# Altium PCB Kasli_BP_Adapter.PCBDOC (part 3 of 3)
Units mil, origin at the board's own origin, x right, y up, seen from the top; angles counter-clockwise.
Board outline 2027.63 x 3937 mil, 4 copper layers (TopLayer, MP(G), MidLayer1, BottomLayer), stack 64.961 mil thick; 18 components, 82 nets, 256 pads, 42 vias.
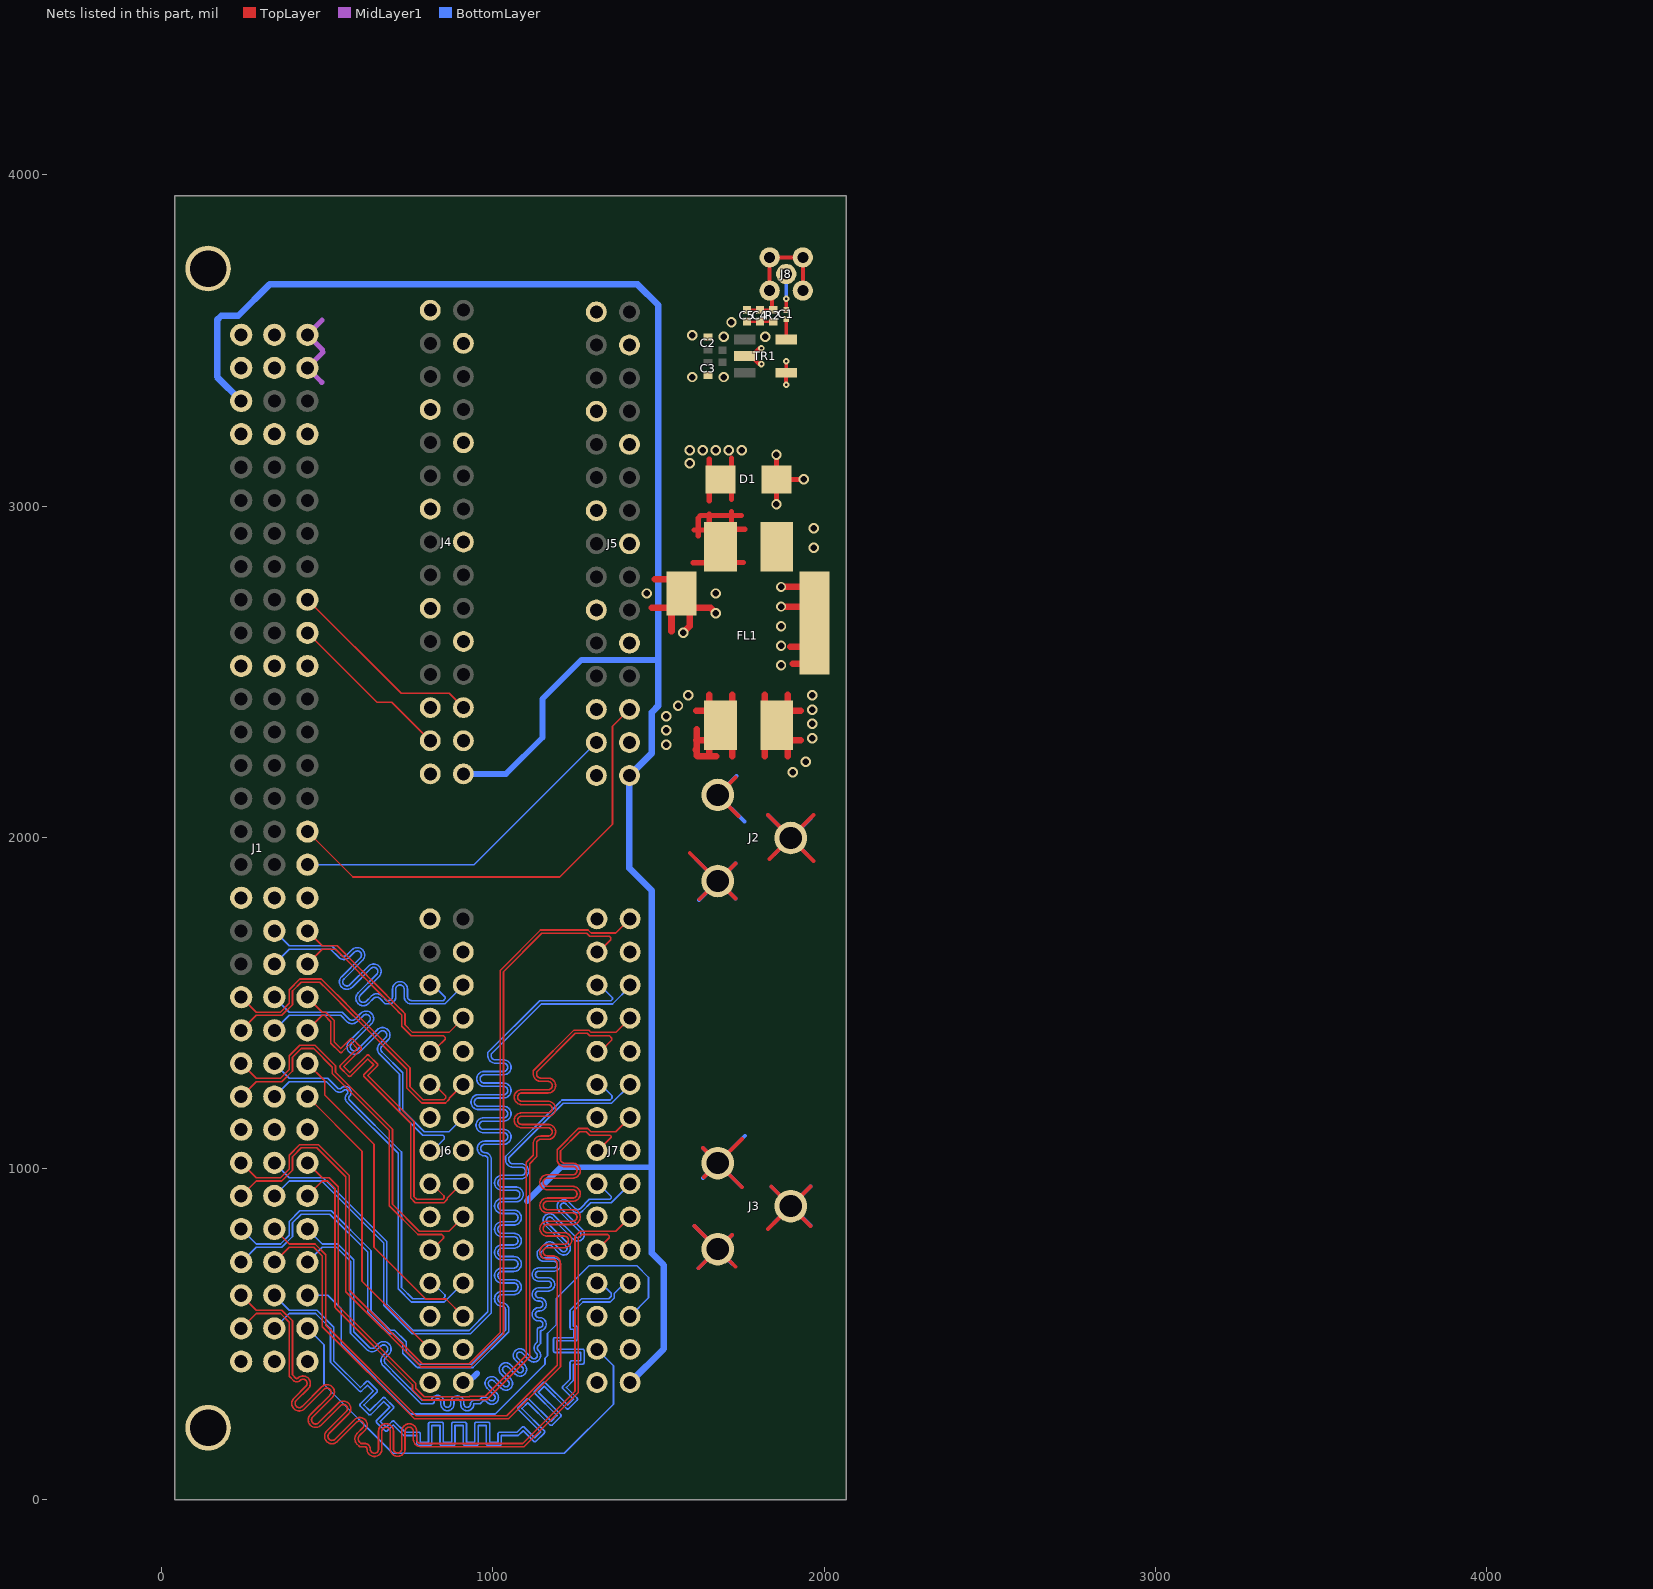
[diagram p4: the nets of this part, all layers, seen from the top]

## Via types
v1: diameter 31.5, hole 19.68, TopLayer to BottomLayer, tented both sides, 37 vias
v2: diameter 19.68, hole 7.87, TopLayer to BottomLayer, tented both sides, 5 vias

## Nets (pads, with @x,y where several pads share a name; then routed paths per layer and width w, separated by ;. In a path a pad name is that pad's centre, name@x,y a point inside that pad or via, vN(x,y) a via of type N, cw(c..) or ccw(c..) an arc to the next point about the centre after c; other vN are vias at no path point) (continued)
EXT10.LVDS_1_N: J1.b13 J6.6 | length 1148.4
  BottomLayer w5: J1.b13@340.16,1617.32 385.16,1662.32 509.68,1662.32 534.34,1637.66 ccw(c550.24,1653.58) 566.14,1637.66 581.91,1653.44 cw(c590.75,1644.6) 599.59,1653.44 cw(c590.75,1644.6) 603.25,1644.6 cw(c590.75,1644.6) 599.59,1635.76 543.31,1579.48 ccw(c559.22,1563.57) 543.31,1547.66 ccw(c559.22,1563.57) 575.12,1547.65 631.41,1603.94 cw(c640.25,1595.1) 649.09,1603.94 cw(c640.25,1595.1) 652.75,1595.1 cw(c640.25,1595.1) 649.09,1586.26 592.8,1529.97 ccw(c608.72,1514.07) 592.81,1498.16 ccw(c608.72,1514.07) 624.62,1498.15 640.39,1513.93 cw(c649.23,1505.09) 658.07,1513.93 675,1497 684.57,1497 ccw(c684.57,1519.5) 707.07,1519.5 707.07,1541.8 cw(c719.57,1541.8) 732.07,1541.8 732.07,1519.5 ccw(c754.57,1519.5) 754.57,1497 854.58,1497 J6.6@910.43,1552.86
EXT10.LVDS_1_P: J1.b14 J6.5 | length 1139.6
  BottomLayer w5: J1.b14@340.16,1717.32 385.16,1672.32 513.82,1672.32 541.4,1644.74 ccw(c550.24,1653.58) 559.08,1644.74 574.84,1660.51 cw(c590.75,1644.6) 606.66,1660.51 cw(c590.75,1644.6) 613.25,1644.6 cw(c590.75,1644.6) 606.66,1628.69 550.38,1572.41 ccw(c559.22,1563.57) 550.38,1554.73 ccw(c559.22,1563.57) 568.06,1554.73 624.35,1611.02 cw(c640.25,1595.1) 656.16,1611.01 cw(c640.25,1595.1) 662.75,1595.1 cw(c640.25,1595.1) 656.16,1579.19 599.88,1522.91 ccw(c608.72,1514.07) 599.88,1505.23 ccw(c608.72,1514.07) 617.56,1505.23 633.32,1521 ; 633.33,1521.01 cw(c649.23,1505.09) 665.13,1521.01 679.14,1507 684.57,1507 ccw(c684.57,1519.5) 697.07,1519.5 697.07,1541.8 cw(c719.57,1541.8) 742.07,1541.8 742.07,1519.5 ccw(c754.57,1519.5) 754.57,1507 850.43,1507 856.65,1513.22 856.65,1517.36 820.08,1553.94 J6.5@810.43,1553.94
EXT10.LVDS_2_N: J1.c13 J6.9 | length 603.2
  TopLayer w5: J1.c13@440.16,1617.32 485.16,1662.32 525.68,1662.32 575.11,1612.89 592.79,1595.21 599.86,1588.14 626.02,1561.98 636,1552 708.93,1479.07 716,1472 724.51,1463.49 724.51,1429.64 753.21,1400.94 851.03,1400.94 856.3,1395.67 856.3,1390.75 J6.9@832.78,1367.22
EXT10.LVDS_2_P: J1.c14 J6.8 | length 634.8
  TopLayer w5: J1.c14@440.16,1717.32 485.16,1672.32 529.82,1672.32 582.18,1619.96 599.86,1602.28 606.93,1595.21 635.12,1567.02 643.07,1559.07 716,1486.14 724.51,1477.63 734.51,1467.63 734.51,1433.78 757.35,1410.94 867.44,1410.94 J6.8@910.43,1453.94
EXT10.LVDS_3_N: J1.a11 J6.12 | length 963.4
  TopLayer w5: J1.a11@240.16,1417.32 285.16,1462.32 362.89,1462.32 395.19,1494.63 395.19,1535.95 421.53,1562.29 477.71,1562.29 501.07,1538.93 535.38,1504.62 542.45,1497.55 560.13,1479.87 600.78,1439.22 740,1300 740,1243 785,1198 856.83,1198 868.27,1209.44 868.27,1211.77 J6.12@910.43,1253.94
EXT10.LVDS_3_P: J1.a12 J6.11 | length 944
  TopLayer w5: J1.a12@240.16,1517.32 285.16,1472.32 358.75,1472.32 385.19,1498.77 385.19,1540.09 417.39,1572.29 481.86,1572.29 508.14,1546 549.52,1504.62 567.2,1486.94 574.27,1479.87 607.86,1446.28 750,1304.14 750,1247.14 789.14,1208 852.69,1208 858.27,1213.58 858.27,1218.5 J6.11@822.83,1253.94
EXT10.LVDS_4_N: J1.b11 J6.15 | length 1114.3
  BottomLayer w5: J1.b11@340.16,1417.32 385.16,1462.32 540.68,1462.32 559.09,1443.91 ccw(c574.99,1459.83) 590.89,1443.91 608.58,1461.6 cw(c617.41,1452.76) 626.25,1461.6 cw(c617.41,1452.76) 629.91,1452.76 cw(c617.41,1452.76) 626.25,1443.92 566.15,1383.82 ccw(c582.06,1367.91) 566.15,1352 ccw(c582.06,1367.91) 597.96,1351.99 658.07,1412.1 cw(c666.91,1403.26) 675.75,1412.1 cw(c666.91,1403.26) 679.41,1403.26 cw(c666.91,1403.26) 675.75,1394.42 658.06,1376.74 ccw(c673.98,1360.84) 658.07,1344.93 718,1285 718,1171.42 788.48,1100.94 848.97,1100.94 853.15,1096.76 853.15,1089.37 817.72,1053.94 J6.15@810.43,1053.94
EXT10.LVDS_4_P: J1.b12 J6.14 | length 1122.8
  BottomLayer w5: J1.b12@340.16,1517.32 385.16,1472.32 544.82,1472.32 566.15,1450.99 ccw(c574.99,1459.83) 583.83,1450.99 601.51,1468.67 ; 601.51,1468.68 cw(c617.41,1452.76) 633.32,1468.67 cw(c617.41,1452.76) 639.91,1452.76 cw(c617.41,1452.76) 633.32,1436.85 573.22,1376.75 ccw(c582.06,1367.91) 573.22,1359.07 ccw(c582.06,1367.91) 590.9,1359.07 651.01,1419.18 cw(c666.91,1403.26) 682.82,1419.17 cw(c666.91,1403.26) 689.41,1403.26 cw(c666.91,1403.26) 682.82,1387.35 665.14,1369.68 ccw(c673.98,1360.84) 665.14,1352 728,1289.14 728,1175.57 792.62,1110.94 867.44,1110.94 ; 867.44,1111.22 867.72,1111.22 J6.14@910.43,1153.94
EXT10.LVDS_5_N: J1.c11 J6.18 | length 1157.8
  TopLayer w5: J1.c11@440.16,1417.32 485.16,1462.32 491.54,1462.32 511,1442.86 511,1377.86 537.3,1351.55 ccw(c540.84,1355.09) 544.37,1351.55 ; 544.39,1351.57 573.16,1380.34 590.84,1362.66 539.5,1311.32 ccw(c543.03,1307.79) 539.5,1304.25 564.24,1279.5 ccw(c567.78,1283.04) 571.32,1279.5 ; 571.33,1279.52 622.66,1330.84 640.34,1313.17 611.56,1284.39 ccw(c615.09,1280.84) 611.55,1277.31 752,1136.86 752,910.86 765.92,896.93 852.51,896.93 862.36,906.79 862.36,910.93 905.37,953.94 J6.18@910.43,953.94
EXT10.LVDS_5_P: J1.c12 J6.17 | length 1138.6
  TopLayer w5: J1.c12@440.16,1517.32 485.16,1472.32 495.68,1472.32 521,1447 521,1382 540.84,1362.16 569.63,1390.95 cw(c573.16,1387.41) 576.7,1390.95 601.43,1366.21 cw(c597.91,1362.66) 602.91,1362.66 cw(c597.91,1362.66) 601.44,1359.13 550.1,1307.79 567.78,1290.11 619.12,1341.45 cw(c622.66,1337.91) 626.19,1341.45 650.94,1316.7 cw(c647.41,1313.17) 652.41,1313.17 cw(c647.41,1313.17) 650.94,1309.63 622.16,1280.84 762,1141 762,915 770.07,906.93 848.37,906.93 852.36,910.93 852.36,917.07 815.5,953.94 J6.17@810.43,953.94
EXT10.LVDS_6_N: J1.a9 J6.21 | length 1136.1
  TopLayer w5: J1.a9@240.16,1217.32 285.16,1262.32 362.89,1262.32 395.19,1294.63 395.19,1335.95 421.53,1362.29 458.78,1362.29 515,1306.07 515,1286.86 687,1114.86 687,887.8 773.86,800.94 845.94,800.94 851.15,795.73 851.15,789.14 815.95,753.94 J6.21@810.43,753.94
EXT10.LVDS_6_P: J1.a10 J6.20 | length 1149.1
  TopLayer w5: J1.a10@240.16,1317.32 285.16,1272.32 358.75,1272.32 385.19,1298.77 385.19,1340.09 417.39,1372.29 462.93,1372.29 525,1310.21 525,1291 697,1119 697,891.94 778,810.94 867.44,810.94 J6.20@910.43,853.94
EXT10.LVDS_7_N: J1.b9 J6.24 | length 1156.3
  BottomLayer w5: J1.b9@340.16,1217.32 385.16,1262.32 497.68,1262.32 524.43,1235.58 ccw(c536.8,1247.95) 549.17,1235.57 cw(c554.48,1230.27) 559.78,1235.57 cw(c554.48,1230.27) 561.98,1230.27 cw(c554.48,1230.27) 559.78,1224.97 ccw(c572.15,1212.59) 559.78,1200.22 714,1046 714,636.86 753.92,596.93 853.43,596.93 865.31,608.82 ; 865.43,608.82 865.43,608.94 J6.24@910.43,653.94
EXT10.LVDS_7_P: J1.b10 J6.23 | length 1135.9
  BottomLayer w5: J1.b10@340.16,1317.32 385.16,1272.32 501.82,1272.32 531.5,1242.64 ccw(c536.8,1247.95) 542.1,1242.65 cw(c554.48,1230.27) 571.98,1230.27 cw(c554.48,1230.27) 566.85,1217.9 ccw(c572.15,1212.59) 566.85,1207.29 724,1050.14 724,641 758.07,606.93 849.25,606.93 855.31,613 855.31,618.11 J6.23@819.49,653.94
EXT11.LVDS_0_N: J1.a6 J7.3 | length 2927.3
  TopLayer w5: J1.a6@240.16,917.32 285.16,962.32 362.89,962.32 395.19,994.63 395.19,1035.95 421.53,1062.29 468.71,1062.29 556,975 556,628 782,402 783.06,400.94 932.39,400.94 1032,500.56 1032,1594 1148,1710 1283.36,1710 1292.42,1700.94 1351.94,1700.94 1356.23,1696.66 1356.23,1691.02 J7.3@1327.61,1662.4 ; J7.3@1314.37,1653.94 J7.3@1325.22,1664.79
EXT11.LVDS_0_P: J1.a7 J7.2 | length 2940
  TopLayer w5: J1.a7@240.16,1017.32 285.16,972.32 358.75,972.32 385.19,998.77 385.19,1040.09 417.39,1072.29 472.86,1072.29 519.07,1026.07 566,979.14 566,632.14 787.2,410.94 928.24,410.94 1022,504.7 1022,1598.14 1143.86,1720 1287.5,1720 1296.56,1710.94 1371.37,1710.94 J7.2@1414.37,1753.94
EXT11.LVDS_1_N: J1.b6 J7.6 | length 2940.9
  BottomLayer w5: J1.b6@340.16,917.32 385.16,962.32 483,962.32 670.12,775.2 670.12,586.74 755.92,500.94 932.39,500.94 995,563.56 995,1028.66 ccw(c975.59,1028.66) 975.76,1048.07 ; 975.68,1048.07 cw(c975.68,1060.57) 975.68,1073.07 1032.41,1073.07 ccw(c1032.41,1095.57) 1054.91,1095.57 ccw(c1032.41,1095.57) 1032.41,1118.07 971.7,1118.07 cw(c971.7,1130.57) 971.7,1143.07 1032.41,1143.07 ccw(c1032.41,1165.57) 1054.91,1165.57 ccw(c1032.41,1165.57) 1032.41,1188.07 956.51,1188.07 cw(c956.51,1200.57) 956.51,1213.07 1032.41,1213.07 ccw(c1032.41,1235.57) 1054.91,1235.57 ccw(c1032.41,1235.57) 1032.41,1258.07 973.87,1258.07 cw(c973.87,1270.57) 973.87,1283.07 1032.41,1283.07 ccw(c1032.41,1305.57) 1054.91,1305.57 ccw(c1032.41,1305.57) 1032.41,1328.07 1007.5,1328.07 cw(c1007.5,1340.57) 995,1340.57 995,1346 1145.93,1496.93 1361.08,1496.93 1414.37,1550.23 J7.6@1414.37,1553.94
EXT11.LVDS_1_P: J1.b7 J7.5 | length 2922.3
  BottomLayer w5: J1.b7@340.16,1017.32 385.16,972.32 487.14,972.32 680.12,779.35 680.12,590.88 760.06,510.94 928.24,510.94 985,567.7 985,1028.66 ccw(c975.59,1028.66) 975.59,1038.07 ; 975.52,1038.07 cw(c975.68,1060.57) 975.68,1083.07 1032.41,1083.07 ccw(c1032.41,1095.57) 1044.91,1095.57 ccw(c1032.41,1095.57) 1032.41,1108.07 971.7,1108.07 cw(c971.7,1130.57) 971.7,1153.07 1032.41,1153.07 ccw(c1032.41,1165.57) 1044.91,1165.57 ccw(c1032.41,1165.57) 1032.41,1178.07 956.51,1178.07 cw(c956.51,1200.57) 956.51,1223.07 1032.41,1223.07 ccw(c1032.41,1235.57) 1044.91,1235.57 ccw(c1032.41,1235.57) 1032.41,1248.07 973.87,1248.07 cw(c973.87,1270.57) 973.87,1293.07 1032.41,1293.07 ccw(c1032.41,1305.57) 1044.91,1305.57 ccw(c1032.41,1305.57) 1032.41,1318.07 1007.5,1318.07 cw(c1007.5,1340.57) 985,1340.57 985,1350.14 1141.79,1506.93 1356.93,1506.93 1361.22,1511.22 1361.22,1515.75 J7.5@1323.03,1553.94
EXT11.LVDS_2_N: J1.c6 J7.9 | length 2923.8
  TopLayer w5: J1.c6@440.16,917.32 485.16,962.32 501.54,962.32 523.14,940.72 523.14,580.86 526.07,577.93 757.44,346.56 757.44,331.99 788.48,300.94 932.39,300.94 933.44,302 981.14,302 1111,431.86 1111,1014.86 1132,1035.86 1132,1075.57 cw(c1144.5,1075.57) 1144.5,1088.07 1166.87,1088.07 ccw(c1166.87,1110.57) 1189.37,1110.57 ccw(c1166.87,1110.57) 1166.87,1133.07 1087.13,1133.07 cw(c1087.13,1145.57) 1087.13,1158.07 1166.87,1158.07 ccw(c1166.87,1180.57) 1189.37,1180.57 ccw(c1166.87,1180.57) 1166.87,1203.07 1087.13,1203.07 cw(c1087.13,1215.57) 1087.13,1228.07 1166.87,1228.07 ccw(c1166.87,1250.57) 1189.37,1250.57 ccw(c1166.87,1250.57) 1166.87,1273.07 1144.5,1273.07 cw(c1144.5,1285.57) 1132,1285.57 1132,1291 1249,1408 1285.36,1408 1292.42,1400.94 1352.01,1400.94 1359.25,1393.7 1359.25,1387.8 J7.9@1325.39,1353.94
EXT11.LVDS_2_P: J1.c7 J7.8 | length 2940
  TopLayer w5: J1.c7@440.16,1017.32 485.16,972.32 505.68,972.32 508.61,969.39 533.14,944.86 533.14,585 767.44,350.7 767.44,336.13 792.62,310.94 928.24,310.94 929.3,312 977,312 1101,436 1101,1019 1122,1040 1122,1075.57 cw(c1144.5,1075.57) 1144.5,1098.07 1166.87,1098.07 ccw(c1166.87,1110.57) 1179.37,1110.57 ccw(c1166.87,1110.57) 1166.87,1123.07 1087.13,1123.07 cw(c1087.13,1145.57) 1087.13,1168.07 1166.87,1168.07 ccw(c1166.87,1180.57) 1179.37,1180.57 ccw(c1166.87,1180.57) 1166.87,1193.07 1087.13,1193.07 cw(c1087.13,1215.57) 1087.13,1238.07 1166.87,1238.07 ccw(c1166.87,1250.57) 1179.37,1250.57 ccw(c1166.87,1250.57) 1166.87,1263.07 1144.5,1263.07 cw(c1144.5,1285.57) 1122,1285.57 1122,1295.14 1244.86,1418 1289.5,1418 1296.56,1410.94 1371.37,1410.94 J7.8@1414.37,1453.94
EXT11.LVDS_3_N: J1.a4 J7.12 | length 2947.1
  BottomLayer w5: J1.a4@240.16,717.32 285.16,762.32 362.89,762.32 395.19,794.63 395.19,835.95 421.53,862.29 507.71,862.29 621.89,748.11 621.89,566.72 686.8,501.81 698.82,501.81 728.15,472.48 728.15,442.71 768.93,401.93 771.86,399 940.14,399 1048.23,507.09 1048.23,573.49 ccw(c1027.42,573.49) 1027.75,594.3 ; 1027.59,594.3 cw(c1027.59,606.8) 1027.59,619.3 1063.41,619.3 ccw(c1063.41,641.8) 1085.91,641.8 ccw(c1063.41,641.8) 1063.41,664.3 1027.59,664.3 cw(c1027.59,676.8) 1027.59,689.3 1063.41,689.3 ccw(c1063.41,711.8) 1085.91,711.8 ccw(c1063.41,711.8) 1063.41,734.3 1027.59,734.3 cw(c1027.59,746.8) 1027.59,759.3 1063.41,759.3 ccw(c1063.41,781.8) 1085.91,781.8 ccw(c1063.41,781.8) 1063.41,804.3 1027.59,804.3 cw(c1027.59,816.8) 1027.59,829.3 1063.41,829.3 ccw(c1063.41,851.8) 1085.91,851.8 ccw(c1063.41,851.8) 1063.41,874.3 1027.59,874.3 cw(c1027.59,886.8) 1027.59,899.3 1069.11,899.3 ccw(c1069.11,921.8) 1091.61,921.8 ccw(c1069.11,921.8) 1069.11,944.3 1027.59,944.3 cw(c1027.59,956.8) 1027.59,969.3 1085.56,969.3 ccw(c1085.56,991.8) 1108.06,991.8 ccw(c1085.56,991.8) 1085.56,1014.3 1060.73,1014.3 cw(c1060.73,1026.8) 1048.23,1026.8 1048.23,1032.23 1212.93,1196.93 1358.08,1196.93 1414.37,1253.23 J7.12@1414.37,1253.94
EXT11.LVDS_3_P: J1.a5 J7.11 | length 2926
  BottomLayer w5: J1.a5@240.16,817.32 285.16,772.32 358.75,772.32 385.19,798.77 385.19,840.09 417.39,872.29 511.86,872.29 631.89,752.25 631.89,570.87 690.94,511.81 702.96,511.81 738.15,476.63 738.15,472.48 738.15,446.85 776,409 936,409 1038.23,511.23 1038.23,573.49 ccw(c1027.42,573.49) 1027.42,584.3 ; 1027.27,584.3 cw(c1027.59,606.8) 1027.59,629.3 1063.41,629.3 ccw(c1063.41,641.8) 1075.91,641.8 ccw(c1063.41,641.8) 1063.41,654.3 1027.59,654.3 cw(c1027.59,676.8) 1027.59,699.3 1063.41,699.3 ccw(c1063.41,711.8) 1075.91,711.8 ccw(c1063.41,711.8) 1063.41,724.3 1027.59,724.3 cw(c1027.59,746.8) 1027.59,769.3 1063.41,769.3 ccw(c1063.41,781.8) 1075.91,781.8 ccw(c1063.41,781.8) 1063.41,794.3 1027.59,794.3 cw(c1027.59,816.8) 1027.59,839.3 1063.41,839.3 ccw(c1063.41,851.8) 1075.91,851.8 ccw(c1063.41,851.8) 1063.41,864.3 1027.59,864.3 cw(c1027.59,886.8) 1027.59,909.3 1069.11,909.3 ccw(c1069.11,921.8) 1081.61,921.8 ccw(c1069.11,921.8) 1069.11,934.3 1027.59,934.3 cw(c1027.59,956.8) 1027.59,979.3 1085.56,979.3 ccw(c1085.56,991.8) 1098.06,991.8 ccw(c1085.56,991.8) 1085.56,1004.3 1060.73,1004.3 cw(c1060.73,1026.8) 1038.23,1026.8 1038.23,1036.37 1200.86,1199 1208.79,1206.93 1353.93,1206.93 1359.6,1212.6 1359.6,1220.13 J7.11@1325.79,1253.94
EXT11.LVDS_4_N: J1.b4 J7.15 | length 2891.4
  TopLayer w5: J1.b4@340.16,717.32 385.16,762.32 458.75,762.32 485.12,735.95 485.12,522.74 763.86,244 1046.14,244 1204,401.86 1204,713.54 ccw(c1181.5,713.54) 1181.5,736.04 1164.42,736.04 cw(c1164.42,748.54) 1164.42,761.04 1215.58,761.04 ccw(c1215.58,783.54) 1238.08,783.54 ccw(c1215.58,783.54) 1215.58,806.04 1164.42,806.04 cw(c1164.42,818.54) 1164.42,831.04 1241.5,831.04 ccw(c1241.5,853.54) 1264,853.54 ccw(c1241.5,853.54) 1241.5,876.04 1164.42,876.04 cw(c1164.42,888.54) 1164.42,901.04 1241.5,901.04 ccw(c1241.5,923.54) 1264,923.54 ccw(c1241.5,923.54) 1241.5,946.04 1164.42,946.04 cw(c1164.42,958.54) 1164.42,971.04 1241.5,971.04 ccw(c1241.5,993.54) 1264,993.54 ccw(c1241.5,993.54) 1241.5,1016.04 1216.5,1016.04 cw(c1216.5,1028.54) 1204,1028.54 1204,1053 1261.94,1110.94 1282.42,1110.94 1292.42,1100.94 1353.78,1100.94 1357.28,1097.44 1357.28,1094.49 J7.15@1316.73,1053.94
EXT11.LVDS_4_P: J1.b5 J7.14 | length 2904.5
  TopLayer w5: J1.b5@340.16,817.32 385.16,772.32 462.89,772.32 495.12,740.09 495.12,526.88 768,254 1042,254 1194,406 1194,713.54 ccw(c1181.5,713.54) 1181.5,726.04 1164.42,726.04 cw(c1164.42,748.54) 1164.42,771.04 1215.58,771.04 ccw(c1215.58,783.54) 1228.08,783.54 ccw(c1215.58,783.54) 1215.58,796.04 1164.42,796.04 cw(c1164.42,818.54) 1164.42,841.04 1241.5,841.04 ccw(c1241.5,853.54) 1254,853.54 ccw(c1241.5,853.54) 1241.5,866.04 1164.42,866.04 cw(c1164.42,888.54) 1164.42,911.04 1241.5,911.04 ccw(c1241.5,923.54) 1254,923.54 ccw(c1241.5,923.54) 1241.5,936.04 1164.42,936.04 cw(c1164.42,958.54) 1164.42,981.04 1241.5,981.04 ccw(c1241.5,993.54) 1254,993.54 ccw(c1241.5,993.54) 1241.5,1006.04 1216.5,1006.04 cw(c1216.5,1028.54) 1194,1028.54 1194,1057.14 1257.8,1120.94 1286.56,1120.94 1296.56,1110.94 1371.37,1110.94 J7.14@1414.37,1153.94
EXT11.LVDS_5_N: J1.c4 J7.18 | length 2916
  BottomLayer w5: J1.c4@440.16,717.32 485.16,762.32 528,762.32 570,720.32 570,502.86 619.3,453.56 ccw(c635.21,469.47) 651.12,453.56 661.28,463.72 cw(c670.12,454.89) 678.94,463.74 ; 678.98,463.71 cw(c670.12,454.89) 682.62,454.89 cw(c670.12,454.89) 678.96,446.05 668.8,435.88 ccw(c684.71,419.97) 668.8,404.06 709.66,363.2 782.86,290 817.57,290 ccw(c817.57,295) 822.57,295 cw(c832.52,295) 832.52,304.94 ; 832.63,304.94 cw(c832.63,295) 842.57,295 842.57,288.92 ccw(c862.57,288.92) 882.57,288.92 882.57,295 cw(c890.63,295) 890.63,303.06 894.52,303.06 cw(c894.52,295) 902.57,295 902.57,288.92 ccw(c922.57,288.92) 942.57,288.92 cw(c943.65,288.92) 943.65,290 962.14,290 965.07,292.93 970.37,298.23 cw(c974.6,294.01) 978.82,298.23 982.87,294.18 ccw(c997.01,308.33) 1017.01,308.33 ccw(c997.01,308.33) 1011.15,322.47 989.16,344.46 cw(c996.24,351.53) 989.15,358.58 cw(c996.24,351.53) 1003.31,358.6 1025.3,336.61 ccw(c1039.44,350.75) 1059.44,350.75 ccw(c1039.44,350.75) 1053.58,364.89 1032.13,386.34 cw(c1039.2,393.41) 1032.12,400.46 ; 1032.13,400.48 cw(c1039.2,393.41) 1046.28,400.48 1067.72,379.04 ccw(c1081.87,393.18) 1101.87,393.18 ccw(c1081.87,393.18) 1096.01,407.32 1074.56,428.77 cw(c1081.63,435.84) 1074.54,442.89 cw(c1081.63,435.84) 1088.7,442.91 1110.15,421.46 ccw(c1124.29,435.6) 1144.29,435.6 ccw(c1124.29,435.6) 1138.43,449.75 1137.23,450.95 cw(c1144.3,458.02) 1137.23,465.09 1144,471.86 1144,510.16 ccw(c1141.08,529.95) 1161.08,529.95 ccw(c1141.08,529.95) 1141.08,549.95 1138.64,549.95 cw(c1138.64,559.95) 1138.64,569.95 1141.08,569.95 ccw(c1141.08,589.95) 1161.08,589.95 ccw(c1141.08,589.95) 1141.08,609.95 1138.64,609.95 cw(c1138.64,619.95) 1138.64,629.95 1166.64,629.95 ccw(c1166.64,649.95) 1186.64,649.95 ccw(c1166.64,649.95) 1166.64,669.95 1138.64,669.95 cw(c1138.64,679.95) 1138.64,689.95 1184,689.95 ccw(c1184,709.95) 1204,709.95 ccw(c1184,709.95) 1184,729.95 1154,729.95 cw(c1154,739.95) 1144,739.95 1144,745.38 1164.44,765.82 cw(c1171.51,758.74) 1178.58,765.82 1199.79,744.6 ccw(c1213.94,758.74) 1233.94,758.74 ccw(c1213.94,758.74) 1228.08,772.89 1164.44,836.53 cw(c1171.51,843.6) 1164.42,850.65 ; 1164.44,850.67 cw(c1171.51,843.6) 1178.58,850.67 1242.22,787.03 ccw(c1256.36,801.17) 1276.36,801.17 ccw(c1256.36,801.17) 1270.5,815.31 1206.86,878.95 cw(c1213.94,886.02) 1206.85,893.08 cw(c1213.94,886.02) 1221.01,893.1 1242.22,871.88 ccw(c1256.36,886.02) 1270.5,871.88 1295.56,896.93 1357.37,896.93 J7.18@1414.37,953.94
EXT11.LVDS_5_P: J1.c5 J7.17 | length 2895.4
  BottomLayer w5: J1.c5@440.16,817.32 485.16,772.32 532.14,772.32 580,724.46 580,507 626.37,460.63 ccw(c635.21,469.47) 644.05,460.63 654.21,470.8 cw(c670.12,454.89) 686.03,470.8 cw(c670.12,454.89) 692.62,454.89 cw(c670.12,454.89) 686.03,438.98 675.87,428.81 ccw(c684.71,419.97) 675.87,411.13 716.73,370.27 780.34,306.66 783.68,303.32 787,300 813.21,300 cw(c832.52,295) 832.52,314.94 ; 832.63,314.94 cw(c832.63,295) 852.57,295 852.57,288.92 ccw(c862.57,288.92) 872.57,288.92 872.57,295 cw(c890.63,295) 890.63,313.06 894.52,313.06 cw(c894.52,295) 912.57,295 912.57,288.92 ccw(c922.57,288.92) 932.57,288.92 cw(c943.65,288.92) 943.65,300 958,300 963.3,305.3 cw(c974.6,294.01) 985.89,305.3 989.94,301.25 ccw(c997.01,308.33) 1004.07,301.24 ; 1004.08,301.25 ccw(c997.01,308.33) 1007.01,308.33 ccw(c997.01,308.33) 1004.08,315.4 982.09,337.39 cw(c996.24,351.53) 1010.38,365.67 1032.37,343.68 ccw(c1039.44,350.75) 1046.49,343.66 ; 1046.51,343.68 ccw(c1039.44,350.75) 1049.44,350.75 ccw(c1039.44,350.75) 1046.51,357.82 1025.06,379.27 cw(c1039.2,393.41) 1053.35,407.55 1074.79,386.11 ccw(c1081.87,393.18) 1088.92,386.09 ; 1088.94,386.11 ccw(c1081.87,393.18) 1091.87,393.18 ccw(c1081.87,393.18) 1088.94,400.25 1067.49,421.7 cw(c1081.63,435.84) 1095.77,449.98 1117.22,428.53 ccw(c1124.29,435.6) 1131.34,428.51 ; 1131.36,428.53 ccw(c1124.29,435.6) 1134.29,435.6 ccw(c1124.29,435.6) 1131.36,442.68 1130.16,443.88 cw(c1144.3,458.02) 1130.16,472.16 1134,476 1134,512.87 cw(c1141.08,512.87) 1141.08,519.95 ccw(c1141.08,529.95) 1151.08,529.95 ccw(c1141.08,529.95) 1141.08,539.95 1138.64,539.95 cw(c1138.64,559.95) 1138.64,579.95 1141.08,579.95 ccw(c1141.08,589.95) 1151.08,589.95 ccw(c1141.08,589.95) 1141.08,599.95 1138.64,599.95 cw(c1138.64,619.95) 1138.64,639.95 1166.64,639.95 ccw(c1166.64,649.95) 1176.64,649.95 ccw(c1166.64,649.95) 1166.64,659.95 1138.64,659.95 cw(c1138.64,679.95) 1138.64,699.95 1184,699.95 ccw(c1184,709.95) 1194,709.95 ccw(c1184,709.95) 1184,719.95 1154,719.95 cw(c1154,739.95) 1134,739.95 1134,749.52 1157.37,772.89 cw(c1171.51,758.74) 1185.65,772.89 1206.86,751.67 ccw(c1213.94,758.74) 1220.99,751.66 ccw(c1213.94,758.74) 1223.94,758.74 ccw(c1213.94,758.74) 1221.01,765.82 1157.37,829.46 cw(c1171.51,843.6) 1185.65,857.74 1249.29,794.1 ccw(c1256.36,801.17) 1263.41,794.08 ; 1263.43,794.1 ccw(c1256.36,801.17) 1266.36,801.17 ccw(c1256.36,801.17) 1263.43,808.24 1199.79,871.88 cw(c1213.94,886.02) 1228.08,900.17 1249.29,878.95 ccw(c1256.36,886.02) 1263.43,878.95 1291.41,906.93 1353.22,906.93 1357.28,910.99 1357.28,915.35 J7.17@1318.7,953.94
EXT11.LVDS_6_N: J1.a2 J7.21 | length 2918.9
  TopLayer w5: J1.a2@240.16,517.32 285.16,562.32 358.75,562.32 385.12,535.95 385.12,372.74 397.79,360.06 ccw(c407.8,370.07) 417.81,360.06 cw(c426.65,351.23) 439.15,351.23 cw(c426.65,351.23) 435.49,342.39 399.52,306.43 ccw(c415.43,290.52) 431.33,274.6 490.32,333.59 cw(c499.16,324.75) 511.66,324.75 cw(c499.16,324.75) 508,315.91 449.01,256.92 ccw(c464.93,241.02) 480.83,225.1 539.82,284.09 cw(c548.66,275.25) 561.16,275.25 cw(c548.66,275.25) 557.5,266.41 498.51,207.42 ccw(c514.43,191.52) 530.34,175.61 589.32,234.59 cw(c598.16,225.75) 610.66,225.75 cw(c598.16,225.75) 607,216.91 589.88,199.8 ; 589.87,199.79 ccw(c605.79,183.89) 589.87,167.99 597.86,160 612.85,160 cw(c612.85,152.92) 619.93,152.92 ccw(c642.43,152.92) 664.93,152.92 664.93,206.71 cw(c677.43,206.71) 689.93,206.71 689.93,153.71 ccw(c712.43,153.71) 734.93,153.71 734.93,206.71 cw(c747.43,206.71) 759.93,206.71 759.93,182.5 ccw(c782.43,182.5) 782.43,160 1094.14,160 1258,323.86 1258,791 1267.94,800.94 1346.7,800.94 1351.38,796.26 1351.38,790.95 J7.21@1314.37,753.94
EXT11.LVDS_6_P: J1.a3 J7.20 | length 2940
  TopLayer w5: J1.a3@240.16,617.32 285.16,572.32 362.89,572.32 395.12,540.09 395.12,376.88 404.86,367.14 ccw(c407.8,370.07) 410.74,367.14 cw(c426.65,351.23) 449.15,351.23 cw(c426.65,351.23) 442.56,335.32 406.59,299.35 ccw(c415.43,290.52) 424.27,281.68 483.26,340.67 cw(c499.16,324.75) 521.66,324.75 cw(c499.16,324.75) 515.07,308.84 456.09,249.86 ccw(c464.93,241.02) 473.77,232.18 532.75,291.16 cw(c548.66,275.25) 571.16,275.25 cw(c548.66,275.25) 564.58,259.35 505.59,200.36 ccw(c514.43,191.52) 523.27,182.68 582.25,241.66 cw(c598.16,225.75) 620.66,225.75 cw(c598.16,225.75) 614.08,209.85 ; 614.07,209.84 596.95,192.73 ccw(c605.79,183.89) 596.95,175.05 602,170 612.85,170 cw(c612.85,152.92) 629.93,152.92 ccw(c642.43,152.92) 654.93,152.92 654.93,206.71 cw(c677.43,206.71) 699.93,206.71 699.93,153.71 ccw(c712.43,153.71) 724.93,153.71 724.93,206.71 cw(c747.43,206.71) 769.93,206.71 769.93,182.5 ccw(c782.43,182.5) 782.43,170 1090,170 1248,328 1248,795.14 1263.8,810.94 1371.37,810.94 J7.20@1414.37,853.94
EXT11.LVDS_7_N: J1.b2 J7.24 | length 2925.1
  BottomLayer w5: J1.b2@340.16,517.32 385.16,562.32 464.68,562.32 510,517 510,414.86 596.54,328.31 ccw(c600.1,331.83) 603.63,328.3 621.31,345.98 638.99,328.3 600.11,289.42 ccw(c603.63,285.87) 600.1,282.34 624.84,257.59 ccw(c628.38,261.12) 631.91,257.59 ; 631.93,257.6 670.81,296.48 688.48,278.8 649.61,239.93 ; 649.59,239.91 ccw(c653.13,236.37) 649.59,232.84 674.33,208.11 ccw(c677.88,211.63) 681.41,208.09 699.09,225.77 730.96,193.9 770.5,193.9 770.5,168.9 ccw(c775.5,168.9) 775.5,163.9 810.5,163.9 ccw(c810.5,168.9) 815.5,168.9 815.5,223.9 840.5,223.9 840.5,168.9 ccw(c845.5,168.9) 845.5,163.9 880.5,163.9 ccw(c880.5,168.9) 885.5,168.9 885.5,223.9 910.5,223.9 910.5,168.9 ccw(c915.5,168.9) 915.5,163.9 950.5,163.9 ccw(c950.5,168.9) 955.5,168.9 955.5,223.9 980.5,223.9 980.5,168.9 ccw(c985.5,168.9) 985.5,163.9 1020.5,163.9 ccw(c1020.5,168.9) 1025.5,168.9 1025.5,193.9 1077.04,193.9 1091.35,208.2 1123.15,176.4 ccw(c1126.7,179.92) 1130.24,176.38 1154.99,201.13 ccw(c1151.45,204.67) 1156.45,204.67 ccw(c1151.45,204.67) 1154.99,208.2 1087.81,275.38 1105.49,293.06 1172.66,225.88 ccw(c1176.2,229.42) 1179.73,225.88 1204.48,250.63 ccw(c1200.95,254.17) 1205.95,254.17 ccw(c1200.95,254.17) 1204.48,257.7 1137.31,324.88 1154.99,342.55 1222.15,275.39 ccw(c1225.7,278.91) 1229.23,275.38 1253.98,300.13 ccw(c1250.45,303.66) 1255.45,303.66 ccw(c1250.45,303.66) 1253.98,307.2 ; 1253.97,307.21 1222.16,339.02 1243.11,359.97 1243.11,409.5 1270.6,409.5 ccw(c1270.6,414.5) 1275.6,414.5 1275.6,449.5 ccw(c1270.6,449.5) 1270.6,454.5 1193.11,454.5 1193.11,479.5 1249.96,479.5 ccw(c1249.96,484.5) 1254.96,484.5 1254.96,519.5 ccw(c1249.96,519.5) 1249.96,524.5 1243.11,524.5 1243.11,568.12 1271.93,596.93 1354.19,596.93 1367,609.75 1367,623 1397.94,653.94 J7.24@1414.37,653.94
EXT11.LVDS_7_P: J1.b3 J7.23 | length 2903.8
  BottomLayer w5: J1.b3@340.16,617.32 385.16,572.32 468.82,572.32 520,521.14 520,419 600.1,338.9 617.77,356.58 cw(c621.31,353.05) 624.84,356.58 ; 624.86,356.57 649.59,331.83 cw(c646.06,328.3) 651.06,328.3 cw(c646.06,328.3) 649.59,324.76 610.7,285.87 628.38,268.19 667.27,307.09 cw(c670.81,303.55) 674.34,307.09 ; 674.36,307.07 699.07,282.35 ; 699.07,275.25 660.2,236.37 677.88,218.7 695.55,236.37 cw(c699.09,232.84) 702.63,236.37 735.1,203.9 775.5,203.9 cw(c775.5,198.9) 780.5,198.9 780.5,173.9 805.5,173.9 805.5,228.9 cw(c810.5,228.9) 810.5,233.9 845.5,233.9 cw(c845.5,228.9) 850.5,228.9 850.5,173.9 875.5,173.9 875.5,228.9 cw(c880.5,228.9) 880.5,233.9 915.5,233.9 cw(c915.5,228.9) 920.5,228.9 920.5,173.9 945.5,173.9 945.5,228.9 cw(c950.5,228.9) 950.5,233.9 985.5,233.9 cw(c985.5,228.9) 990.5,228.9 990.5,173.9 1015.5,173.9 1015.5,198.9 cw(c1020.5,198.9) 1020.5,203.9 1072.9,203.9 1087.81,218.81 cw(c1091.35,215.28) 1094.88,218.81 1126.7,186.99 1144.38,204.67 1077.2,271.84 cw(c1080.74,275.38) 1077.2,278.91 ; 699.09,275.27 ccw(c695.55,278.8) 700.55,278.8 ccw(c695.55,278.8) 699.09,282.34 ; 1077.22,278.93 1101.95,303.66 cw(c1105.49,300.13) 1109.02,303.66 ; 1109.04,303.65 1176.2,236.49 1193.88,254.17 1126.7,321.34 cw(c1130.24,324.88) 1126.7,328.41 ; 1126.72,328.43 1151.45,353.16 cw(c1154.99,349.63) 1158.52,353.16 ; 1158.54,353.15 1225.7,285.99 1243.37,303.66 1211.55,335.48 cw(c1215.09,339.02) 1211.55,342.55 1233.11,364.11 1233.11,414.5 cw(c1238.11,414.5) 1238.11,419.5 1265.6,419.5 1265.6,444.5 1188.11,444.5 cw(c1188.11,449.5) 1183.11,449.5 1183.11,484.5 cw(c1188.11,484.5) 1188.11,489.5 1244.96,489.5 1244.96,514.5 1238.11,514.5 cw(c1238.11,519.5) 1233.11,519.5 1233.11,572.26 1267.78,606.93 1350.04,606.93 1357,613.89 1357,623 1326.06,653.94 J7.23@1314.37,653.94
GND: C2.1 C3.2 C4.1 C5.1 D1.2 FL1.4 J1.a1 J1.a8 J1.a15 J1.a22 J1.a29 J1.b1 J1.b8 J1.b15 J1.b22 J1.b29 J1.c1 J1.c8 J1.c15 J1.c22 J1.c29 J1.MTG1 J1.MTG2 J4.1 J4.4 J4.7 J4.10 J4.13 J4.16 J4.19 J4.22 J4.25 J5.1 J5.4 J5.7 J5.10 J5.13 J5.16 J5.19 J5.22 J5.25 J6.1 J6.4 J6.7 J6.10 J6.13 J6.16 J6.19 J6.22 J6.25 J7.1 J7.4 J7.7 J7.10 J7.13 J7.16 J7.19 J7.22 J7.25 R2.1 TR1.2 TR1.6 | length 1428.6
  TopLayer w7.87: C5.1@1768.5,3556.3 1807.09,3556.3 R2.1@1846.46,3556.3 ; FL1.4@1970.79,2529.85 1970.79,2576.45 FL1.4@1970.79,2647.37
  TopLayer w11.81: TR1.2@1760.24,3452.75 TR1.2@1779.53,3452.75 ; v2(1811.02,3429.13) 1803.16,3429.13 TR1.2@1779.53,3452.75 ; v2(1811.02,3476.37) 1803.14,3476.37 TR1.2@1779.53,3452.75 ; v2(1885.43,3366.54) TR1.6@1885.43,3402.75 1885.83,3403.15 v2(1885.83,3437.01)
  TopLayer w15.75: v1(1856.3,3005.91) D1.2@1856.3,3080.71 ; v1(1856.3,3155.51) D1.2@1856.3,3080.71 ; v1(1938.98,3080.71) D1.2@1856.3,3080.71
  TopLayer w19.68: 1480.31,2692.91 1535.43,2692.91 1535.43,2702.17 FL1.4@1569.22,2735.95 1539.37,2765.8 1539.37,2779.53 1488.19,2779.53 ; 1539.37,2622.05 FL1.4@1539.37,2692.91 ; FL1.4@1570.87,2692.91 FL1.4@1594.49,2692.91 ; v1(1574.8,2618.11) 1594.49,2637.8 FL1.4@1594.49,2692.91 ; v1(1673.23,2677.17) 1657.48,2692.91 FL1.4@1594.49,2692.91 ; v1(1870.08,2696.85) 1970.79,2696.85 FL1.4@1976.38,2696.85 ; v1(1870.08,2755.91) FL1.4@1968.5,2755.91 ; 1897.64,2574.8 1969.14,2574.8 FL1.4@1970.79,2576.45 ; 1905.51,2523.62 1964.57,2523.62 FL1.4@1970.79,2529.85
  other v1: 1870.08,2519.68 1870.08,2578.74 1870.08,2637.8 1464.57,2736.22 1673.23,2736.22 1968.5,2874.02 1968.5,2933.07 1602.36,3389.76 1696.85,3389.76 1696.85,3511.81 1822.83,3511.81 1602.36,3515.75 1720.47,3555.12
I2C_SCL_8: J1.c23 J4.27 | length 505.8
  TopLayer w5: J1.c23@440.16,2617.32 650,2407.48 695.08,2407.48 J4.27@811.02,2291.54
I2C_SCL_9: J1.c16 J5.27 | length 1025.1
  BottomLayer w5: J1.c16@440.16,1917.32 943.31,1917.32 J5.27@1312.4,2286.42
I2C_SCL_10: J1.c9 J6.27 | length 916.8
  TopLayer w5: J1.c9@440.16,1217.32 605,1052.48 605,659.37 J6.27@810.43,453.94
I2C_SCL_11: J1.c2 J7.27 | length 1397.9
  BottomLayer w5: J1.c2@440.16,517.32 490,467.48 490,348 698,140 1215.79,140 1364.17,288.39 1364.17,404.13 J7.27@1314.37,453.94
I2C_SDA_8: J1.c24 J4.26 | length 605.8
  TopLayer w5: J1.c24@440.16,2717.32 722.95,2434.53 868.03,2434.53 J4.26@911.02,2391.54
I2C_SDA_9: J1.c17 J5.26 | length 1412.2
  TopLayer w5: J1.c17@440.16,2017.32 577.48,1880 1201.85,1880 1361,2039.15 1361,2335.02 J5.26@1412.4,2386.42
I2C_SDA_10: J1.c10 J6.26 | length 993.8
  TopLayer w5: J1.c10@440.16,1317.32 492,1265.48 492,1222 641,1073 641,762.57 797.57,606 858.37,606 J6.26@910.43,553.94
I2C_SDA_11: J1.c3 J7.26 | length 1677.4
  BottomLayer w5: J1.c3@440.16,617.32 501.68,617.32 542,577 542,469 752,259 1007,259 1157.5,409.5 1157.5,426.76 1165,434.26 1165,502 1192,529 1192,608 1290,706 1435,706 1470,671 1470,609.57 J7.26@1414.37,553.94
NetC1_1: C1.1 TR1.4 | length 61.8
  TopLayer w11.81: TR1.4@1885.83,3503.15 C1.1@1885.83,3564.96
NetC1_2: C1.2 J8.1 | length 108.3
  TopLayer w11.81: C1.2@1885.83,3592.52 v2(1885.83,3625.98)
  BottomLayer w11.81: v2(1885.83,3625.98) J8.1@1885.83,3700.79
NetC4_2: C4.2 C5.2 J8.2 R2.2 | length 433.1
  TopLayer w7.87: C5.2@1767.72,3592.52 C4.2@1807.09,3592.52 1837.8,3592.52 R2.2@1842.52,3597.24
  TopLayer w11.81: R2.2@1842.52,3597.24 1842.52,3644.09 J8.2@1835.83,3650.79 J8.2@1835.83,3750.79 J8.2@1935.83,3750.79 J8.2@1935.83,3650.79
NetFL1_1: FL1.1 J2.3 J3.3 | length 1954.6
  TopLayer w11.81: 1594.49,1952.76 J2.3@1679.13,1868.11 ; 1608.92,826.77 J3.3@1679.13,756.56 ; 1621.39,698.82 J3.3@1679.13,756.56 ; 1624.02,1812.99 J2.3@1679.13,1868.11 ; 1722.44,799.87 J3.3@1679.13,756.56 ; 1732.28,703.41 J3.3@1679.13,756.56 ; 1732.28,1814.96 J2.3@1679.13,1868.11 ; 1732.28,1921.26 J2.3@1679.13,1868.11
  TopLayer w19.68: 1614.17,2293.31 1615.16,2293.31 ; 1614.17,2381.89 1643.75,2381.89 FL1.1@1653.54,2372.1 ; 1615.16,2325.79 1615.16,2293.31 ; 1653.54,2431.1 FL1.1@1653.54,2372.1 ; 1675.2,2244.09 1653.54,2244.09 ; 1722.44,2244.09 1722.44,2273.62 1691.53,2304.53 1687.33,2304.53 FL1.1@1653.54,2304.53 ; 1722.44,2431.1 1722.44,2373.43 FL1.1@1687.33,2338.31 ; 1615.16,2293.31 1615.16,2267.72 1612.2,2264.76 1616.14,2260.83 1616.14,2247.05 1619.09,2244.09 1653.54,2244.09 ; 1615.16,2293.31 1642.32,2293.31 FL1.1@1653.54,2304.53 ; 1653.54,2244.09 FL1.1@1653.54,2304.53 ; FL1.1@1653.54,2304.53 FL1.1@1687.33,2338.31 ; FL1.1@1653.54,2372.1 FL1.1@1687.33,2338.31
  BottomLayer w11.81: 1608.92,826.77 J3.3@1679.13,756.56 ; 1614.17,1933.07 J2.3@1679.13,1868.11 ; 1621.39,698.82 J3.3@1679.13,756.56 ; 1622.05,1811.02 J2.3@1679.13,1868.11 ; 1722.44,713.26 J3.3@1679.13,756.56 ; 1722.44,799.87 J3.3@1679.13,756.56 ; 1732.28,1814.96 J2.3@1679.13,1868.11 ; 1732.28,1921.26 J2.3@1679.13,1868.11
  other v1: 1523.62,2279.53 1523.62,2322.83 1523.62,2366.14 1559.06,2397.64 1590.55,2429.13
NetFL1_3: FL1.3 J2.1 J2.2 J3.1 J3.2 | length 2994.1
  TopLayer w11.81: 1633.86,1061.68 J3.2@1679.13,1016.4 ; 1637.06,974.33 J3.2@1679.13,1016.4 ; J2.2@1681.1,2127.95 J2.2@1679.13,2127.95 ; 1732.28,2181.1 J2.2@1679.13,2127.95 ; 1742.13,2064.96 J2.2@1679.13,2127.95 ; 1751.97,943.57 J3.2@1679.13,1016.4 ; 1751.97,1089.24 J3.2@1679.13,1016.4 ; 1830.71,817.58 J3.1@1899.61,886.48 ; 1830.71,2066.93 J2.1@1899.61,1998.03 ; 1835.63,1934.06 J2.1@1899.61,1998.03 ; 1840.55,945.54 J3.1@1899.61,886.48 ; 1958.66,945.54 J3.1@1899.61,886.48 ; 1959.32,826.77 J3.1@1899.61,886.48 ; 1968.5,1929.13 J2.1@1899.61,1998.03 ; 1968.5,2066.93 J2.1@1899.61,1998.03
  TopLayer w19.68: 1820.87,2244.09 1820.87,2302.56 FL1.3@1856.62,2338.31 ; 1820.87,2431.1 1820.87,2374.07 FL1.3@1856.62,2338.31 ; 1889.76,2244.09 FL1.3@1889.76,2305.17 ; 1889.76,2431.1 FL1.3@1889.76,2371.46 ; 1929.13,2293.31 1901.62,2293.31 FL1.3@1889.76,2305.17 ; 1929.13,2381.89 1900.19,2381.89 FL1.3@1889.76,2371.46 ; FL1.3@1856.62,2338.31 FL1.3@1889.76,2305.17 ; FL1.3@1856.62,2338.31 FL1.3@1889.76,2371.46 ; FL1.3@1889.76,2305.17 1889.76,2338.31 FL1.3@1889.76,2371.46
  BottomLayer w11.81: 1633.86,971.13 J3.2@1679.13,1016.4 ; 1633.86,1061.68 J3.2@1679.13,1016.4 ; 1736.22,2185.04 J2.2@1679.13,2127.95 1759.84,2047.24 ; 1750.66,944.88 J3.2@1679.13,1016.4 ; 1761.81,1099.08 J3.2@1679.13,1016.4 ; 1830.71,2066.93 J2.1@1899.61,1998.03 ; 1841.21,944.88 J3.1@1899.61,886.48 ; 1849.74,836.61 J3.1@1899.61,886.48 ; 1850.39,1948.82 J2.1@1899.61,1998.03 ; 1948.82,1948.82 J2.1@1899.61,1998.03 ; 1958.66,827.43 J3.1@1899.61,886.48 ; 1958.66,945.54 J3.1@1899.61,886.48 ; 1958.66,2057.09 J2.1@1899.61,1998.03
  other v1: 1905.51,2196.85 1944.88,2228.35 1964.57,2299.21 1964.57,2342.52 1964.57,2385.83 1964.57,2429.13
P3V3: J1.a30 J4.30 J5.30 J6.30 J7.30 | length 6314.7
  BottomLayer w17.72: J4.30@911.02,2191.54 1039.54,2191.54 1149.61,2301.61 1149.61,2418 1267.38,2535.77 1491.79,2535.77 1500,2527.56 ; J6.30@924.8,353.94 952.76,381.89 ; 1102.36,901.57 1204.72,1003.94 1480.31,1003.94
  BottomLayer w19.68: J1.a30@240.16,3317.32 167.32,3390.16 167.32,3562.29 180.04,3575 231.5,3575 325.79,3669.29 1437.01,3669.29 1500,3606.3 1500,2527.56 1500,2397.64 1480.31,2377.95 1480.31,2254.33 J5.30@1412.4,2186.42 1412.4,1906.5 1480.31,1838.58 1480.31,1003.94 1480.31,744.09 1515.75,708.66 1515.75,455.32 J7.30@1414.37,353.94
P12V0: D1.1 FL1.2 J1.a31 J1.a32 J1.b31 J1.b32 J1.c31 J1.c32 J4.28 J4.29 J5.28 J5.29 J6.28 J6.29 J7.28 J7.29 | length 1339.9
  TopLayer w15.75: 1605.31,2828.74 1661.42,2828.74 FL1.2@1687.33,2854.65 ; 1608.27,2928.15 1620.08,2928.15 ; 1620.08,2910.43 1620.08,2928.15 ; 1653.54,2975.39 1653.54,2971.46 ; 1653.54,3015.75 1653.54,3080.71 1653.54,3141.73 ; FL1.2@1655.51,2814.96 1687.33,2846.77 FL1.2@1687.33,2854.65 ; 1720.47,2983.27 1720.47,2971.46 ; 1720.47,3019.68 1720.47,3080.71 1720.47,3145.67 ; 1750.98,2971.46 1720.47,2971.46 ; 1756.89,2829.72 1725.39,2829.72 1725.39,2839.62 FL1.2@1687.33,2877.68 ; 1760.83,2930.12 1721.46,2930.12 FL1.2@1720.47,2929.13 ; 1620.08,2928.15 1620.08,2964.57 1626.97,2971.46 1653.54,2971.46 ; 1620.08,2928.15 FL1.2@1653.54,2928.15 ; FL1.2@1653.54,2928.15 1653.54,2971.46 ; FL1.2@1653.54,2928.15 1653.54,2911.47 FL1.2@1687.33,2877.68 ; 1653.54,2971.46 1720.47,2971.46 ; FL1.2@1687.33,2854.65 FL1.2@1687.33,2877.68 ; FL1.2@1687.33,2877.68 1720.47,2910.83 FL1.2@1720.47,2929.13 ; FL1.2@1687.33,2877.68 1687.33,2895.99 FL1.2@1720.47,2929.13 ; FL1.2@1720.47,2929.13 1720.47,2971.46
  MidLayer1 w15.75: 483.46,3374.02 J1.c31@440.16,3417.32 487.4,3464.57 ; 484.25,3561.42 J1.c32@440.16,3517.32 485.04,3472.44
  other v1: 1594.49,3129.92 1594.49,3169.29 1633.86,3169.29 1673.23,3169.29 1712.6,3169.29 1751.97,3169.29
copper on no net: | length 103141.1
  BottomLayer w1: 3071.91,3285.91 3111.59,3246.23 ; 3071.91,3345.91 3171.59,3246.23 ; 3071.91,3405.91 3191.91,3285.91 3231.59,3246.23 ; 3071.91,3465.91 3191.91,3345.91 3291.59,3246.23 ; 3071.91,3525.91 3191.91,3405.91 3311.91,3285.91 3351.59,3246.23 ; 3071.91,3585.91 3191.91,3465.91 3311.91,3345.91 3411.59,3246.23 ; 3071.91,3645.91 3191.91,3525.91 3311.91,3405.91 3431.91,3285.91 3471.59,3246.23 ; 3071.91,3705.91 3191.91,3585.91 3311.91,3465.91 3431.91,3345.91 3531.59,3246.23 ; 3071.91,3765.91 3191.91,3645.91 3311.91,3525.91 3431.91,3405.91 3551.91,3285.91 3591.59,3246.23 ; 3071.91,3825.91 3191.91,3705.91 3311.91,3585.91 3431.91,3465.91 3551.91,3345.91 3651.59,3246.23 ; 3071.91,3885.91 3191.91,3765.91 3311.91,3645.91 3431.91,3525.91 3551.91,3405.91 3671.91,3285.91 3711.59,3246.23 ; 3071.91,3945.91 3191.91,3825.91 3311.91,3705.91 3431.91,3585.91 3551.91,3465.91 3671.91,3345.91 3771.59,3246.23 ; 3071.91,4005.91 3191.91,3885.91 3311.91,3765.91 3431.91,3645.91 3551.91,3525.91 3671.91,3405.91 3791.91,3285.91 3831.59,3246.23 ; 3071.91,4065.91 3191.91,3945.91 3311.91,3825.91 3431.91,3705.91 3551.91,3585.91 3671.91,3465.91 3791.91,3345.91 3891.59,3246.23 ; 3071.91,4125.91 3191.91,4005.91 3311.91,3885.91 3431.91,3765.91 3551.91,3645.91 3671.91,3525.91 3791.91,3405.91 3911.91,3285.91 3951.59,3246.23 ; 3071.91,4185.91 3191.91,4065.91 3311.91,3945.91 3431.91,3825.91 3551.91,3705.91 3671.91,3585.91 3791.91,3465.91 3911.91,3345.91 4011.59,3246.23 ; 3071.91,4245.91 3191.91,4125.91 3311.91,4005.91 3431.91,3885.91 3551.91,3765.91 3671.91,3645.91 3791.91,3525.91 3911.91,3405.91 4031.91,3285.91 4071.59,3246.23 ; 3071.91,4305.91 3191.91,4185.91 3311.91,4065.91 3431.91,3945.91 3551.91,3825.91 3671.91,3705.91 3791.91,3585.91 3911.91,3465.91 4031.91,3345.91 4131.59,3246.23 ; 3071.91,4365.91 3191.91,4245.91 3311.91,4125.91 3431.91,4005.91 3551.91,3885.91 3671.91,3765.91 3791.91,3645.91 3911.91,3525.91 4031.91,3405.91 4151.91,3285.91 4191.59,3246.23 ; 3131.91,4365.91 3191.91,4305.91 3311.91,4185.91 3431.91,4065.91 3551.91,3945.91 3671.91,3825.91 3791.91,3705.91 3911.91,3585.91 4031.91,3465.91 4151.91,3345.91 4251.59,3246.23 ; 3191.91,4365.91 3311.91,4245.91 3431.91,4125.91 3551.91,4005.91 3671.91,3885.91 3791.91,3765.91 3911.91,3645.91 4031.91,3525.91 4151.91,3405.91 4271.91,3285.91 4311.59,3246.23 ; 3251.91,4365.91 3311.91,4305.91 3431.91,4185.91 3551.91,4065.91 3671.91,3945.91 3791.91,3825.91 3911.91,3705.91 4031.91,3585.91 4151.91,3465.91 4271.91,3345.91 4371.59,3246.23 ; 3311.91,4365.91 3431.91,4245.91 3551.91,4125.91 3671.91,4005.91 3791.91,3885.91 3911.91,3765.91 4031.91,3645.91 4151.91,3525.91 4271.91,3405.91 4391.91,3285.91 ; 3371.91,4365.91 3431.91,4305.91 3551.91,4185.91 3671.91,4065.91 3791.91,3945.91 3911.91,3825.91 4031.91,3705.91 4151.91,3585.91 4271.91,3465.91 4391.91,3345.91 ; 3431.91,4365.91 3551.91,4245.91 3671.91,4125.91 3791.91,4005.91 3911.91,3885.91 4031.91,3765.91 4151.91,3645.91 4271.91,3525.91 4391.91,3405.91 ; 3491.91,4365.91 3551.91,4305.91 3671.91,4185.91 3791.91,4065.91 3911.91,3945.91 4031.91,3825.91 4151.91,3705.91 4271.91,3585.91 4391.91,3465.91 ; 3551.91,4365.91 3671.91,4245.91 3791.91,4125.91 3911.91,4005.91 4031.91,3885.91 4151.91,3765.91 4271.91,3645.91 4391.91,3525.91 ; 3611.91,4365.91 3671.91,4305.91 3791.91,4185.91 3911.91,4065.91 4031.91,3945.91 4151.91,3825.91 4271.91,3705.91 4391.91,3585.91 ; 3671.91,4365.91 3791.91,4245.91 3911.91,4125.91 4031.91,4005.91 4151.91,3885.91 4271.91,3765.91 4391.91,3645.91 ; 3731.91,4365.91 3791.91,4305.91 3911.91,4185.91 4031.91,4065.91 4151.91,3945.91 4271.91,3825.91 4391.91,3705.91 ; 3791.91,4365.91 3911.91,4245.91 4031.91,4125.91 4151.91,4005.91 4271.91,3885.91 4391.91,3765.91 ; 3851.91,4365.91 3911.91,4305.91 4031.91,4185.91 4151.91,4065.91 4271.91,3945.91 4391.91,3825.91 ; 3911.91,4365.91 4031.91,4245.91 4151.91,4125.91 4271.91,4005.91 4391.91,3885.91 ; 3971.91,4365.91 4031.91,4305.91 4151.91,4185.91 4271.91,4065.91 4391.91,3945.91 ; 4031.91,4365.91 4151.91,4245.91 4271.91,4125.91 4391.91,4005.91 ; 4091.91,4365.91 4151.91,4305.91 4271.91,4185.91 4391.91,4065.91 ; 4151.91,4365.91 4271.91,4245.91 4391.91,4125.91 ; 4211.91,4365.91 4271.91,4305.91 4391.91,4185.91 ; 4271.91,4365.91 4391.91,4245.91 ; 4331.91,4365.91 4391.91,4305.91
  BottomLayer w15: 2951.91,297 4391.91,297 ; 2951.91,1166.77 4391.91,1166.77 ; 2951.91,2026.53 4391.91,2026.53 ; 2951.91,2676.37 4391.91,2676.37 ; 2951.91,3246.23 4391.91,3246.23 ; 3071.91,-112.91 3071.91,4365.91 ; 3191.91,-112.91 3191.91,297 3191.91,1166.77 3191.91,2026.53 3191.91,2676.37 3191.91,3246.23 3191.91,4365.91 ; 3311.91,-112.91 3311.91,297 3311.91,1166.77 3311.91,2026.53 3311.91,2676.37 3311.91,3246.23 3311.91,4365.91 ; 3431.91,-112.91 3431.91,297 3431.91,1166.77 3431.91,2026.53 3431.91,2676.37 3431.91,3246.23 3431.91,4365.91 ; 3551.91,-112.91 3551.91,297 3551.91,1166.77 3551.91,2026.53 3551.91,2676.37 3551.91,3246.23 3551.91,4365.91 ; 3671.91,-112.91 3671.91,297 3671.91,1166.77 3671.91,2026.53 3671.91,2676.37 3671.91,3246.23 3671.91,4365.91 ; 3791.91,-112.91 3791.91,297 3791.91,1166.77 3791.91,2026.53 3791.91,2676.37 3791.91,3246.23 3791.91,4365.91 ; 3911.91,-112.91 3911.91,297 3911.91,1166.77 3911.91,2026.53 3911.91,2676.37 3911.91,3246.23 3911.91,4365.91 ; 4031.91,-112.91 4031.91,297 4031.91,1166.77 4031.91,2026.53 4031.91,2676.37 4031.91,3246.23 4031.91,4365.91 ; 4151.91,-112.91 4151.91,297 4151.91,1166.77 4151.91,2026.53 4151.91,2676.37 4151.91,3246.23 4151.91,4365.91 ; 4271.91,-112.91 4271.91,297 4271.91,1166.77 4271.91,2026.53 4271.91,2676.37 4271.91,3246.23 4271.91,4365.91 ; 4391.91,297 4391.91,1166.77 ; 4391.91,297 4391.91,-112.91 2951.91,-112.91 2951.91,4365.91 4391.91,4365.91 4391.91,3246.23 ; 4391.91,1166.77 4391.91,2026.53 ; 4391.91,2026.53 4391.91,2676.37 ; 4391.91,2676.37 4391.91,3246.23

## Polygon pours and split planes (outlines as drawn)
GND on TopLayer "GND_L01_P023" (solid, remove dead copper, pour order 23): 2027,3828.74 2027,119 219.69,119 102.36,236.32 102.36,3828.74
NetFL1_3 on TopLayer "NETFL1_3_L01_P021" (solid, remove dead copper, pour order 21): 1998.03,807.09 1998.03,2460.63 1771.65,2460.63 1771.65,2214.57 1624.02,2214.57 1624.02,2047.24 1624.02,807.09
P12V0 on TopLayer "P12V0_L01_P022" (solid, remove dead copper, pour order 22): 1781.5,2765.75 1781.5,3208.66 1564.96,3208.66 1564.96,2765.75
NetFL1_1 on TopLayer "NETFL1_1_L01_P020" (solid, remove dead copper, pour order 20): 1742.13,679.13 1742.13,816.93 1624.02,935.04 1624.02,1564.96 1761.81,1702.76 1761.81,1919.29 1624.02,2057.09 1624.02,2194.88 1643.7,2214.57 1771.65,2214.57 1771.65,2460.63 1496.06,2460.63 1496.06,679.13
GND on BottomLayer "GND_L04_P030" (solid, remove dead copper, pour order 30): 2027,3828.74 2027,119 219.69,119 19.69,319 19.69,3828.74
P3V3 on BottomLayer "P3V3_L04_P028" (solid, remove dead copper, pour order 28): 2017.72,3818.9 246.06,3818.9 246.06,3612.2 110.24,3612.2 110.24,324.8 246.06,324.8 246.06,127.95 2017.72,127.95
NetFL1_1 on BottomLayer "NETFL1_1_L04_P026" (solid, remove dead copper, pour order 26): 1742.13,679.13 1742.13,816.93 1624.02,935.04 1624.02,1564.96 1761.81,1702.76 1761.81,1919.29 1624.02,2057.09 1624.02,2214.57 1771.65,2214.57 1771.65,2460.63 1496.06,2460.63 1496.06,679.13
NetFL1_3 on BottomLayer "NETFL1_3_L04_P027" (solid, remove dead copper, pour order 27): 1998.03,807.09 1998.03,2460.63 1771.65,2460.63 1771.65,2214.57 1624.02,2214.57 1624.02,2047.24 1624.02,807.09
P12V0 on MidLayer1 "P12V0_L03_P024" (solid, remove dead copper, pour order 24): 2027,3828.74 2027,119 219.69,119 118.11,220.57 118.11,3828.74
GND on MP(G) (split plane): 2046.9,20.1 59.47,20.1 59.47,1913.39 59.47,3916.9 2046.9,3916.9

## Keep-outs
KeepOutLayer:
  lines w8: 49.21,319 240,319 240,119 2027,119 2027,3828.74 240,3828.74 240,3619 49.21,3619 49.21,319

## Other copper
BottomLayer:
  text "Board Layer Stack" at 3041.91,3306.23 h60 r90
  text "Constant" at 3041.91,2736.37 h60 r90
  text "3.5" at 3281.91,2736.37 h60 r90
  text "4.2" at 3521.91,2736.37 h60 r90
  text "4.2" at 3761.91,2736.37 h60 r90
  text "4.2" at 4001.91,2736.37 h60 r90
  text "3.5" at 4241.91,2736.37 h60 r90
  text "Thickness" at 3041.91,2086.53 h60 r90
  text "0.010mm" at 3281.91,2086.53 h60 r90
  text "0.070mm" at 3401.91,2086.53 h60 r90
  text "0.180mm" at 3521.91,2086.53 h60 r90
  text "0.035mm" at 3641.91,2086.53 h60 r90
  text "1.080mm" at 3761.91,2086.53 h60 r90
  text "0.035mm" at 3881.91,2086.53 h60 r90
  text "0.180mm" at 4001.91,2086.53 h60 r90
  text "0.070mm" at 4121.91,2086.53 h60 r90
  text "0.010mm" at 4241.91,2086.53 h60 r90
  text "Material" at 3041.91,1226.77 h60 r90
  text "Solder Resist" at 3281.91,1226.77 h60 r90
  text "Copper" at 3401.91,1226.77 h60 r90
  text "FR-4" at 3521.91,1226.77 h60 r90
  text "Copper" at 3641.91,1226.77 h60 r90
  text "Copper" at 3881.91,1226.77 h60 r90
  text "FR-4" at 4001.91,1226.77 h60 r90
  text "Copper" at 4121.91,1226.77 h60 r90
  text "Solder Resist" at 4241.91,1226.77 h60 r90
  text "Name" at 3041.91,357 h60 r90
  text "TopOverlay" at 3161.91,357 h60 r90
  text "TopSolder" at 3281.91,357 h60 r90
  text "TopLayer" at 3401.91,357 h60 r90
  text "Dielectric1" at 3521.91,357 h60 r90
  text "MP(G)" at 3641.91,357 h60 r90
  text "Dielectric6" at 3761.91,357 h60 r90
  text "MidLayer1" at 3881.91,357 h60 r90
  text "Dielectric2" at 4001.91,357 h60 r90
  text "BottomLayer" at 4121.91,357 h60 r90
  text "BottomSolder" at 4241.91,357 h60 r90
  text "BottomOverlay" at 4361.91,357 h60 r90
  text "Layer" at 3041.91,-52.91 h60 r90
  text "1" at 3161.91,-52.91 h60 r90
  text "2" at 3281.91,-52.91 h60 r90
  text "3" at 3401.91,-52.91 h60 r90
  text "4" at 3521.91,-52.91 h60 r90
  text "5" at 3641.91,-52.91 h60 r90
  text "6" at 3761.91,-52.91 h60 r90
  text "7" at 3881.91,-52.91 h60 r90
  text "8" at 4001.91,-52.91 h60 r90
  text "9" at 4121.91,-52.91 h60 r90
  text "10" at 4241.91,-52.91 h60 r90
  text "11" at 4361.91,-52.91 h60 r90

## Silkscreen, mask and mechanical layers (free items; w line width, h text height)
TopOverlay:
  drawing of 1218 lines, arcs and shapes, not listed
  text "EXT8" at 659.45,3641.73 h39.37 r90
  text "EXT9" at 1171.26,3641.73 h39.37 r90
  text "EXT11" at 1171.26,1781.5 h39.37 r90
  text "EXT10" at 659.45,1768.38 h39.37 r90
  text "Kasli / Backplane / v1.1" at 1929.13,137.8 h59.06 r90
Mechanical1:
  lines w3.94: 39.37,0 2067,0 2067,3937 39.37,3937 39.37,3606.3 39.37,3252.95 39.37,2799.21 39.37,2440.94 39.37,1913.39 39.37,1557.47 39.37,1078.74 39.37,712.6 39.37,0